# Altium PCB LED.PcbDoc
Units mm, origin at the board's own origin, x right, y up, seen from the top; angles counter-clockwise.
Board outline 20 x 13 mm, 2 copper layers (Top Layer, Bottom Layer); 3 components, 4 nets, 12 pads, 8 vias.
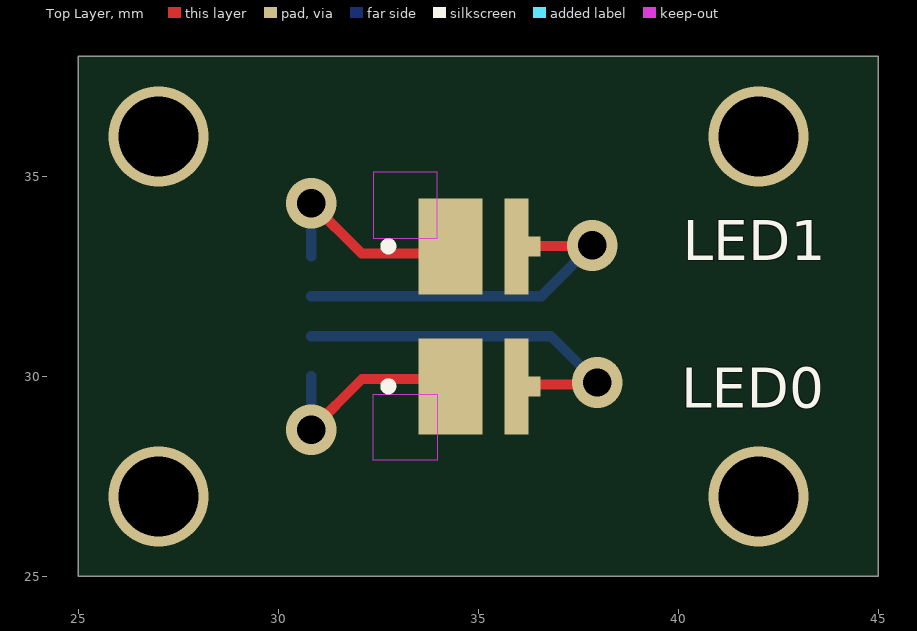
[diagram p0: Top Layer view]
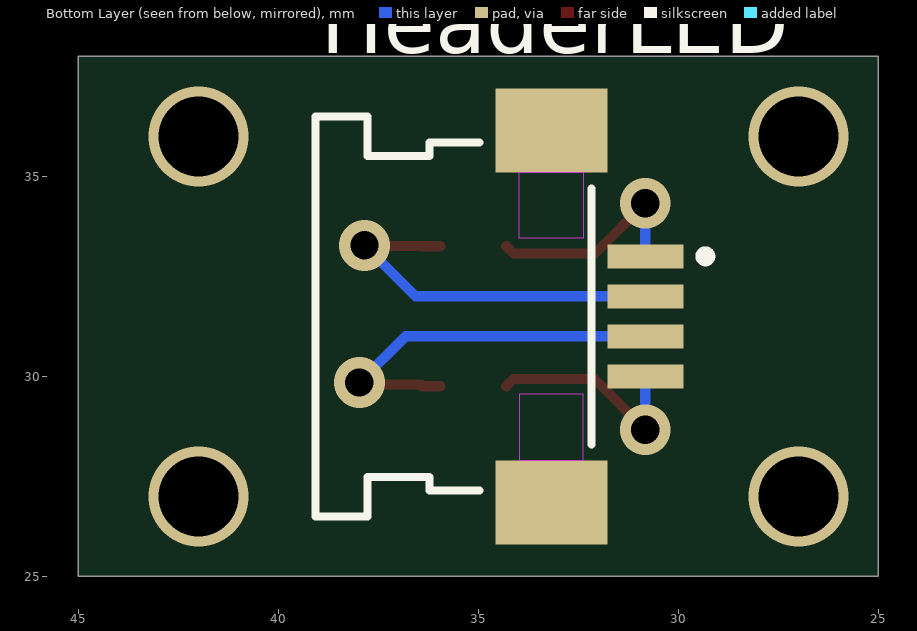
[diagram p1: Bottom Layer view, seen from below]

## Layer stack, top to bottom
Top Solder: solder mask 0.0102, Solder Resist, Dk 3.5
Top Layer: signal copper 0.0356
Dielectric 1: dielectric 0.32, FR-4, Dk 4.8
Bottom Layer: signal copper 0.0356
Bottom Solder: solder mask 0.0102, Solder Resist, Dk 3.5

## Board outline
25,25 45,25 45,38 25,38

## Design rules (kind name [scope] priority, off if disabled: settings)
Clearance [All] p1: gap=0.254 ignorepadtopadclearanceinfootprint=FALSE except(0: Arc-Hole Track-Hole SMDPad-Hole THPad-Hole Via-Hole Fill-Hole Poly-Hole Region-Hole Text-Hole)
PolygonConnect [All] p1: connectstyle=Relief reliefconductorwidth=0.254 reliefentries=4 polygonreliefangle="90 Angle" airgapwidth=0.254
RoutingVias [All] p1: holewidth=0.711 width=1.27 viastyle="Through Hole" minholewidth=0.711 minwidth=1.27 maxholewidth=0.711 maxwidth=1.27
SolderMaskExpansion [All] p1: expansion=0.102 istentingtop=FALSE
Width [All] p1: maxlimit=0.254 minlimit=0.254 preferedwidth=0.254
30 further rules are at their usual default settings.

## Components (designator, comment, footprint, x,y, rotation, side; value= is the part's Value field where it differs from the comment)
HeaderLED "52207-0433" MOLX-52207-0433 32,31.5 r270 bottom
LED0 "MP-3030-1100-56-95" MP303011005780 35,29.75 r0 top
LED1 "MP-3030-1100-56-95" MP303011005780 35,33.25 r0 top

## Footprints (in the part's own frame and the unit in brackets; to place one, negate y for a bottom-side part, rotate by r counter-clockwise, add the part's x,y. Pads: shape width x height; smd on the part's side, far side on the other; paste and mask are expansions set on the pad)
MOLX-52207-0433 [mm] "FPC Connector, 4-Leads, Right Angle, Pitch 1.0 mm, Mated Height 2.7 mm, SMT"
  rect 0.6x1.9 smd: 1(-1.5,1.175) 2(-0.5,1.175) 3(0.5,1.175) 4(1.5,1.175)
  rect 2.1x2.8 smd: MP1(-4.65,-1.175) MP2(4.65,-1.175)
  Keep-Out Layer region: 3.6,-0.375 1.95,-0.375 1.95,-1.975 3.6,-1.975
  Keep-Out Layer region: -3.6,-0.375 -1.95,-0.375 -1.95,-1.975 -3.6,-1.975
  silkscreen extent -5,-7.07 5,2.8, body extent -5.15,-7.07 5.15,1.83, height 2.71
MP303011005780 [mm]
  rect 1.6x2.4 smd: 1(-0.7,0)
  rect 0.6x2.4 smd: 2(0.95,0)
  rect 0.3x0.5 smd: 3(1.4,0)
  silkscreen extent -2.35,-0.1 -2.15,0.1, body extent -1.6,-1.5 1.4,1.5, height 0.62

## Part data
HeaderLED: library part CMP-1241-00170-1, "1.0 mm Pitch Easy-On(TM) Type FPC Connector, 2.7 mm Mated Height, Right Angle, ZIF, SMT, Top Contact, 4 Circuits, -40 to 85 degC, ELV and RoHS Compliant, Tape and Reel", Current (Max per Contact)=1A, Manufacturer=Molex, Voltage (Max)=125V, Circuits (Loaded)=4, ComponentLink1Description="Manufacturer URL", ComponentLink1URL=http://www.molex.com/molex/index.jsp, ComponentLink2Description=Datasheet, ComponentLink2URL=http://www.molex.com/webdocs/datasheets/pdf/en-us/0522070433_FFC_FPC_CONNECTORS.pdf, ComponentLink3Description="Package Specification", ComponentLink3URL=http://www.molex.com/pdm_docs/sd/522070433_sd.pdf, Contact Position=Top, Durability (mating cycles max)=30, Entry Angle="90degrees Angle", Mated Height=2.70mm, Material - Metal="Phosphor Bronze", Material - Plating Mating="Silver, Tin-Bismuth", Material - Plating Termination="Silver, Tin-Bismuth", Mounting Technology="Surface Mount", Number of Rows=1, Orientation="Right Angle", PackageDescription="4-Lead FPC Connector, Pitch 1.0 mm", PackageReference=52207-0433, PackageVersion="Rev. B, 08/2013", Packing="Tape and Reel", PartNumber=52207-0433, PCB Locator=No, PCB Retention=Yes, Pitch - Mating Interface=1.00mm, Pitch - Termination Interface=1.00mm, Polarized to PCB=Yes, RoHS=TRUE, Stackable=No
LED0 LED1: library part MP-3030-1100-57-80, "LED", Manufacturer_Name="Luminus Devices Inc.", Datasheet Link=https://www.mouser.jp/datasheet/2/245/Luminus_MP3030_1100_Datasheet-1512110.pdf, Height=0.52mm, Manufacturer_Part_Number=MP-3030-1100-56-95

## Via types
v1: diameter 1.27, hole 0.711, Top Layer to Bottom Layer, 4 vias
v2: diameter 2.5, hole 2, Top Layer to Bottom Layer, 4 vias

## Nets (pads, with @x,y where several pads share a name; then routed paths per layer and width w, separated by ;. In a path a pad name is that pad's centre, name@x,y a point inside that pad or via, vN(x,y) a via of type N, cw(c..) or ccw(c..) an arc to the next point about the centre after c; other vN are vias at no path point)
NetHeaderLED_1: HeaderLED.1 LED1.1 | length 5.4
  Top Layer w0.254: v1(30.825,34.326) 32.082,33.069 34.119,33.069 LED1.1
  Bottom Layer w0.254: HeaderLED.1 v1(30.825,34.326)
NetHeaderLED_2: HeaderLED.2 LED1.2 LED1.3 | length 9.5
  Top Layer w0.254: LED1.2 LED1.3 36.412,33.262 37.834,33.262 v1(37.846,33.274)
  Bottom Layer w0.254: HeaderLED.2@30.832,31.993 HeaderLED.2 36.572,32 v1(37.846,33.274)
NetHeaderLED_3: HeaderLED.3 LED0.2 LED0.3 | length 9.7
  Top Layer w0.254: LED0.2 LED0.3 36.4,29.774 36.423,29.797 37.925,29.797 v1(37.973,29.845)
  Bottom Layer w0.254: HeaderLED.3 36.818,31 v1(37.973,29.845)
NetHeaderLED_4: HeaderLED.4 LED0.1 | length 5.4
  Top Layer w0.254: v1(30.825,28.666) 32.09,29.931 34.119,29.931 LED0.1
  Bottom Layer w0.254: v1(30.825,28.666) HeaderLED.4
pads on no net: HeaderLED.MP1 HeaderLED.MP2
copper on no net:
  other v2: 27,27 42,27 27,36 42,36

## Silkscreen, mask and mechanical layers (free items; w line width, h text height)
Mechanical 15:
  the board outline again, w0.254